# Altium PCB PCB1.PcbDoc
Units mil, origin at the board's own origin, x right, y up, seen from the top; angles counter-clockwise.
Board outline 1130 x 1130 mil, 2 copper layers (Top Layer, Bottom Layer); 27 components, 43 nets, 137 pads, 26 vias.
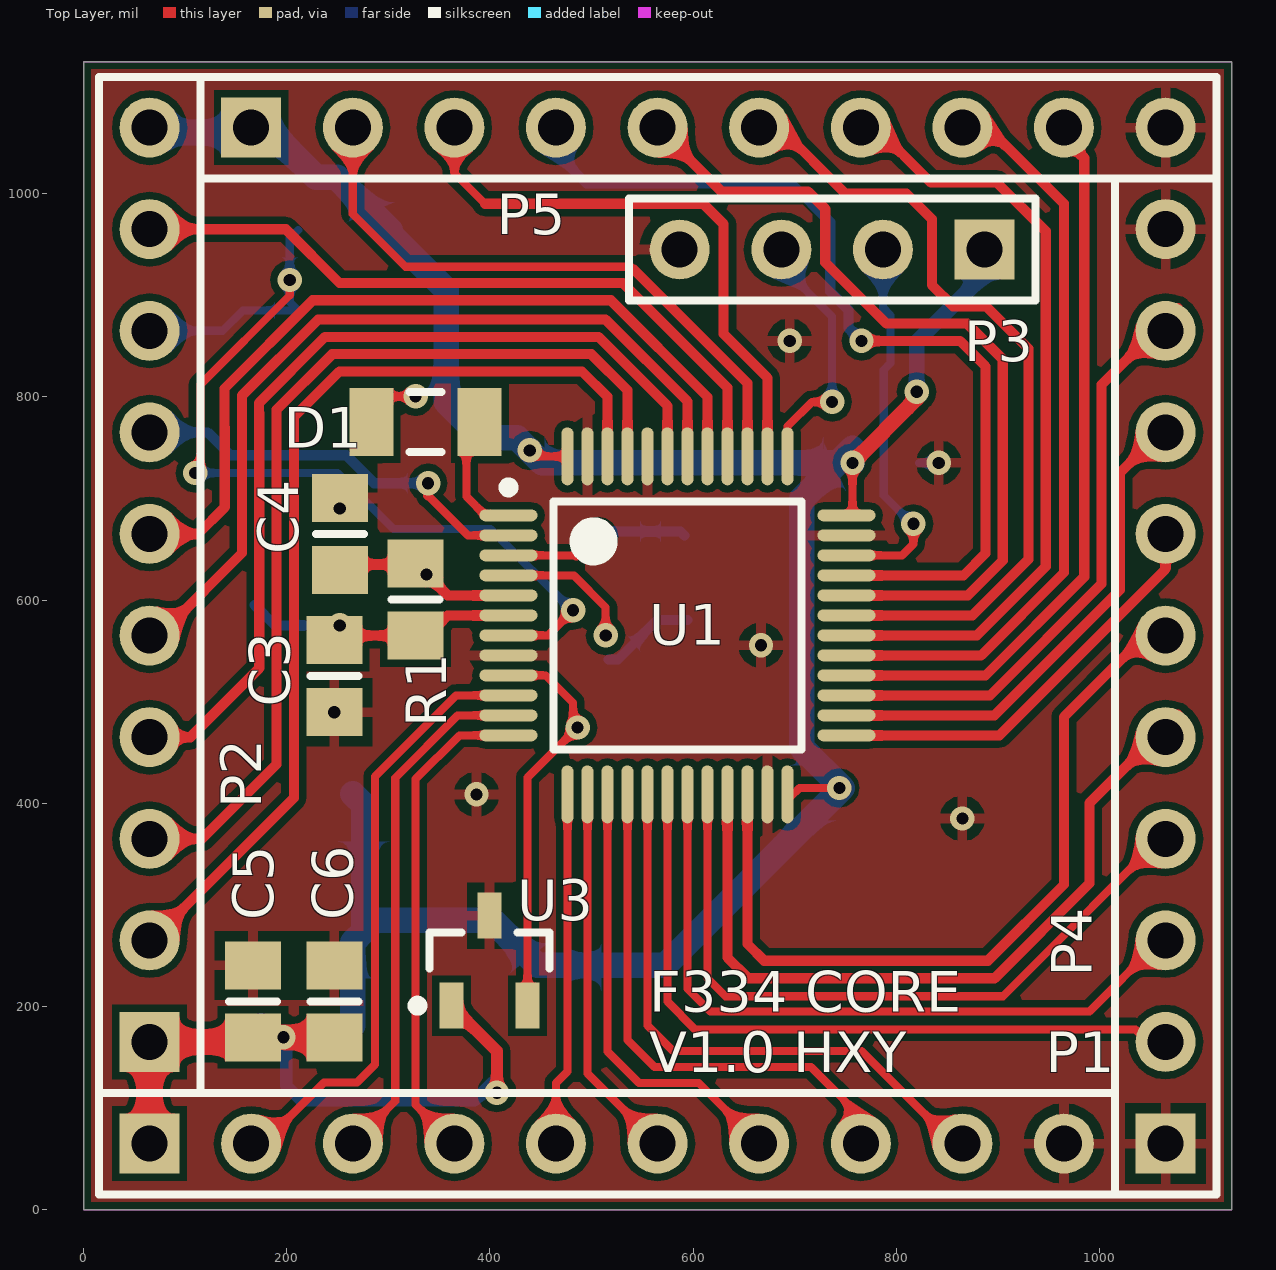
[diagram p0: Top Layer view]
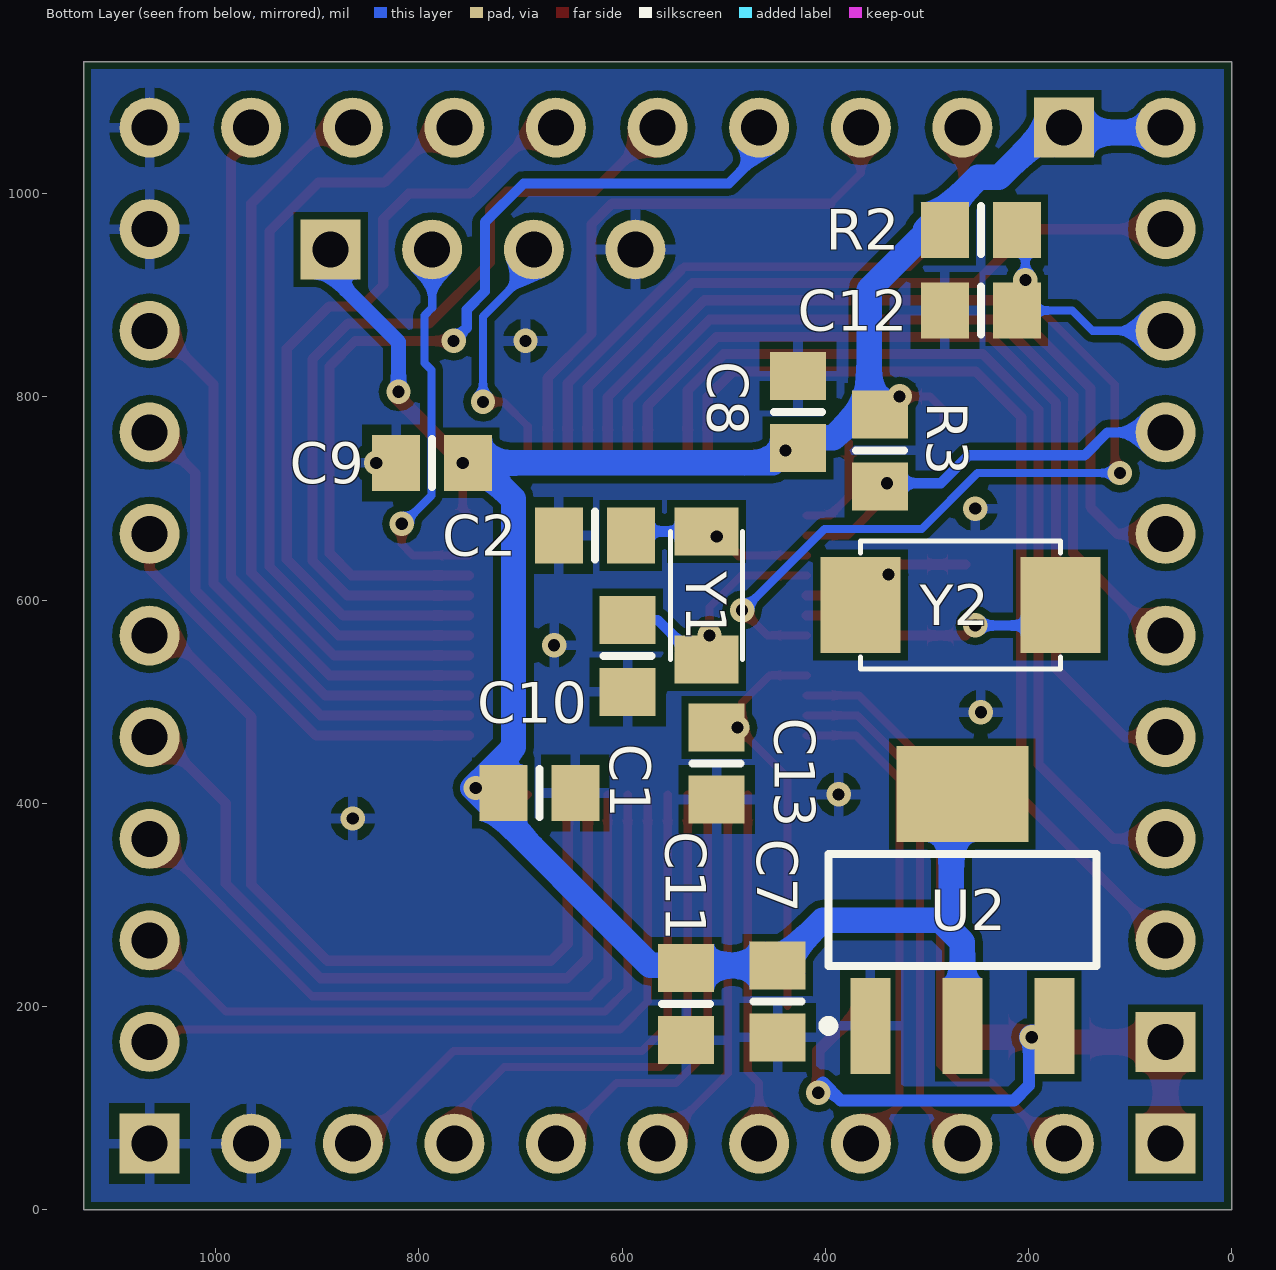
[diagram p1: Bottom Layer view, seen from below]

## Layer stack, top to bottom
Top Solder: solder mask 0.4, Solder Resist, Dk 3.5
Top Layer: signal copper 1.4
Dielectric 1: dielectric 12.6, FR-4, Dk 4.8
Bottom Layer: signal copper 1.4
Bottom Solder: solder mask 0.4, Solder Resist, Dk 3.5

## Board outline
0,0 1130,0 1130,1130 0,1130

## Design rules (kind name [scope] priority, off if disabled: settings)
Clearance [All] p1: gap=7 ignorepadtopadclearanceinfootprint=FALSE
ComponentClearance [All] p1: gap=0 collisioncheckmode=3 verticalgap=10 showdistances=TRUE
PlaneConnect [InNet('GND')] p1: planeconnectstyle=Direct reliefexpansion=20 reliefentries=4 reliefconductorwidth=10 reliefairgap=10
PolygonConnect [All] p1: connectstyle=Relief reliefconductorwidth=10 reliefentries=4 polygonreliefangle="90 Angle" airgapwidth=10
RoutingVias [All] p1: holewidth=28 width=24 viastyle="Through Hole" minholewidth=12 minwidth=24 maxholewidth=12 maxwidth=50
SolderMaskExpansion [All] p1: expansion=4
Width [InNet('5V')] p1: maxlimit=25 minlimit=12 preferedwidth=12
28 further rules are at their usual default settings.

## Components (designator, comment, footprint, x,y, rotation, side; value= is the part's Value field where it differs from the comment)
C1 "Cap" 6-0805_N 594.41,545 r270 bottom value=18pF
C2 "Cap" 6-0805_N 626.81,663.58 r0 bottom value=18pF
C3 "Cap" 6-0805_N 246.81,525 r270 top value=18pF
C4 "Cap" 6-0805_N 252.24,665 r90 top value=18pF
C5 "Cap" 6-0805_N 166.81,205 r270 top value=10uF
C6 "Cap" 6-0805_N 246.81,205 r270 top value=100nF
C7 "Cap" 6-0805_N 446.81,205 r90 bottom locked value=10uF
C8 "Cap" 6-0805_N 426.81,785 r270 bottom locked value=100nF
C9 "Cap" 6-0805_N 786.81,735 r180 bottom value=100nF
C10 "Cap" 6-0805_N 681.42,410 r0 bottom value=100nF
C11 "100nF" 6-0805_N 536.81,202.24 r90 bottom locked
C12 "Cap" 6-0805_N 246.81,885 r180 bottom value=10uF
C13 "100nF" 6-0805_N 506.81,439.06 r90 bottom locked
D1 "1N4148" C1206 336.81,775 r0 top
P1 "Header 10" HDR1X10 65,65 r0 top locked
P2 "Header 10" HDR1X10 65,165 r90 top locked
P3 "调试口" HDR1X4 886.81,945 r180 top locked
P4 "Header 10" HDR1X10 1065,65 r90 top locked
P5 "Header 10" HDR1X10 165,1065 r0 top locked
R1 "Res3" 6-0805_N 326.81,600.43 r90 top locked value=1M
R2 "Res3" 6-0805_N 246.81,964.09 r180 bottom value=10K
R3 "Res1" 6-0805_N 345.98,747.28 r90 bottom locked value=10K
U1 "STM32F103C8T6" LQFP48-7x7 584.57,575 r0 top locked
U2 "LM1117" SOT223_N 265,295 r90 bottom locked
U3 "REF3033" SOT-23_N 399.57,245 r90 top locked
Y1 "32.768K" XTAL-3215 516.81,604.53 r90 bottom locked
Y2 "8M" XTAL-5032 266.81,595 r0 bottom locked

## Footprints (in the part's own frame and the unit in brackets; to place one, negate y for a bottom-side part, rotate by r counter-clockwise, add the part's x,y. Pads: shape width x height; smd on the part's side, far side on the other; paste and mask are expansions set on the pad)
6-0805_N [mm] "Chip Resistor, Body 2.0x1.2mm, IPC Medium Density"
  rect 1.2x1.4 smd: 1(-0.9,0) 2(0.9,0)
  silkscreen extent 0,-0.6 0,0.6, body extent -1.07,-0.7 1.07,0.7, height 0.7
C1206 [mm] "Chip Capacitor, Body 3.2x1.6mm, IPC High Density"
  rect 1.1x1.7 smd: 1(-1.35,0) 2(1.35,0)
  silkscreen extent -0.4,-0.75 0.4,0.75, body extent -1.7,-0.9 1.7,0.9, height 1.3
HDR1X4 [mm] "Connector; Header; 4 Position"
  rect 1.5x1.5 hole 0.9: 1(0,0)
  round 1.5 hole 0.9: 2(2.54,0) 3(5.08,0) 4(7.62,0)
  silkscreen extent -1.27,-1.27 8.89,1.27
HDR1X10 [mm] "Connector; Header; 10 Position"
  rect 1.5x1.5 hole 0.9: 1(0,0)
  round 1.5 hole 0.9: 2(2.54,0) 3(5.08,0) 4(7.62,0) 5(10.16,0) 6(12.7,0) 7(15.24,0) 8(17.78,0) 9(20.32,0) 10(22.86,0)
  silkscreen extent -1.27,-1.27 24.13,1.27
LQFP48-7x7 [mm]
  oval 1.45x0.3 smd: 1(-4.225,2.75) 2(-4.225,2.25) 3(-4.225,1.75) 4(-4.225,1.25) 5(-4.225,0.75) 6(-4.225,0.25) 7(-4.225,-0.25) 8(-4.225,-0.75) 9(-4.225,-1.25) 10(-4.225,-1.75) 11(-4.225,-2.25) 12(-4.225,-2.75) 25(4.225,-2.75) 26(4.225,-2.25) 27(4.225,-1.75) 28(4.225,-1.25) 29(4.225,-0.75) 30(4.225,-0.25) 31(4.225,0.25) 32(4.225,0.75) 33(4.225,1.25) 34(4.225,1.75) 35(4.225,2.25) 36(4.225,2.75)
  oval 0.3x1.45 smd: 13(-2.75,-4.225) 14(-2.25,-4.225) 15(-1.75,-4.225) 16(-1.25,-4.225) 17(-0.75,-4.225) 18(-0.25,-4.225) 19(0.25,-4.225) 20(0.75,-4.225) 21(1.25,-4.225) 22(1.75,-4.225) 23(2.25,-4.225) 24(2.75,-4.225) 37(2.75,4.225) 38(2.25,4.225) 39(1.75,4.225) 40(1.25,4.225) 41(0.75,4.225) 42(0.25,4.225) 43(-0.25,4.225) 44(-0.75,4.225) 45(-1.25,4.225) 46(-1.75,4.225) 47(-2.25,4.225) 48(-2.75,4.225)
  silkscreen extent -4.35,-3.1 3.1,3.57, body extent -3.5,-3.5 3.5,3.5, height 1.6
SOT223_N [mm] "SOT223, 4-Leads, Body 6.5x3.5mm, Pitch 2.3mm, Lead Span 7mm, IPC Medium Density"
  rect 2.4x1 smd: 1(-2.9,2.3) 2(-2.9,0) 3(-2.9,-2.3)
  rect 2.4x3.3 smd: 4(2.9,0)
  silkscreen extent -3.02,-3.35 1.4,3.48, body extent -1.85,-3.35 1.85,3.35, height 1.7
SOT-23_N [mm] "SOT23, 3-Leads, Body 2.9x1.3mm, Pitch 0.95mm, Lead Span 2.5mm, IPC Medium Density"
  rect 1.15x0.6 smd: 1(-1.125,0.95) 2(-1.125,-0.95) 3(1.125,0)
  silkscreen extent -1.25,-1.5 0.7,1.92, body extent -0.7,-1.5 0.7,1.5, height 1.1
XTAL-3215 [mm]
  rect 1.2x1.6 smd: 1(-1.6,0) 2(1.6,0)
  silkscreen extent -1.6,-0.9 1.6,0.9
XTAL-5032 [mm]
  rect 2x2.4 smd: 1(-2.5,0) 2(2.5,0)
  silkscreen extent -2.5,-1.6 2.5,1.6

## Part data
C1 C2 C3 C4 C5 C6 C7 C8 C9 C10 C12: "Capacitor", LatestRevisionDate=17-Jul-2002, LatestRevisionNote="Re-released for DXP Platform.", PackageDescription="Radial Cap, Thru-Hole; 2 Leads; 0.3 in Pin Spacing", PackageReference=RAD-0.3, Published=8-Jun-2000, Publisher="Altium Limited"
C11 C13: library part Cap, "Capacitor", LatestRevisionDate=17-Jul-2002, LatestRevisionNote="Re-released for DXP Platform.", PackageDescription="Radial Cap, Thru-Hole; 2 Leads; 0.3 in Pin Spacing", PackageReference=RAD-0.3, Published=8-Jun-2000, Publisher="Altium Limited"
D1: library part "Diode 1N4148", "High Conductance Fast Diode", Code_JEDEC=DO-204-AH, ComponentLink1Description="Manufacturer Link", ComponentLink1URL=http://www.fairchildsemi.com/, ComponentLink2Description=Datasheet, ComponentLink2URL=http://www.fairchildsemi.com/ds/1N%2F1N4148.pdf, DatasheetVersion=1997, LatestRevisionDate=17-Jul-2002, LatestRevisionNote="Re-released for DXP Platform.", PackageDescription="Diode, Axial; Body 3.8 x 1.9 mm (LxDia. max), Lead Dia. 0.53 mm (max)", PackageReference=DO-35, Published=8-Jun-2000, Publisher="Altium Limited"
P1 P2 P4 P5: "Header, 10-Pin", LatestRevisionDate=17-Jul-2002, LatestRevisionNote="Re-released for DXP Platform.", Publisher="Altium Limited"
P3: library part "Header 4", "Header, 4-Pin", LatestRevisionDate=17-Jul-2002, LatestRevisionNote="Re-released for DXP Platform.", Publisher="Altium Limited"
R1 R2 R3: "Resistor", Published=8-Jun-2000, Publisher="Altium Limited"
  R1 R2: LatestRevisionDate=29-May-2009, LatestRevisionNote="IPC-7351 Footprint Added.", PackageDescription="Chip Resistor", PackageReference=J1-0603
  R3: LatestRevisionDate=17-Jul-2002, LatestRevisionNote="Re-released for DXP Platform.", PackageDescription="Axial Device, Thru-Hole; 2 Leads; 0.3 in Pin Spacing", PackageReference=AXIAL-0.3
U1: library part STM32F103CxT6
U3: library part REF30xx
Y1 Y2: library part XTAL, "Crystal Oscillator", LatestRevisionDate=17-Jul-2002, LatestRevisionNote="Re-released for DXP Platform.", PackageDescription="Crystal, Thru-Hole; 2 Leads; Body 3.1 x 8.2 mm (Dia.xH)", PackageReference=R38, Published=8-Jun-2000, Publisher="Altium Limited"

## Via types
v1: diameter 24, hole 12, Top Layer to Bottom Layer, 26 vias

## Nets (pads, with @x,y where several pads share a name; then routed paths per layer and width w, separated by ;. In a path a pad name is that pad's centre, name@x,y a point inside that pad or via, vN(x,y) a via of type N, cw(c..) or ccw(c..) an arc to the next point about the centre after c; other vN are vias at no path point)
3V3: C7.2 C8.2 C9.2 C10.2 C11.2 D1.1 P2.10 P3.1 P5.1 R2.1 R3.2 U1.24 U1.36 U1.48 U2.2 U2.4 | length 2552.4
  Top Layer w8: D1.1 283.66,787.28 296.81,800.43 v1(326.81,800.43) ; v1(439.09,747.28) 445.04,741.34 U1.48 ; U1.24 695.63,405.87 704.76,415 v1(743.98,415) ; U1.36 756.81,689.17 v1(756.81,735)
  Top Layer w15: v1(756.81,735) 820,798.19 v1(820,805)
  Bottom Layer w8: R2.1 R2.1@301.76,964.09 ; P3.1@886.81,920.72 P3.1
  Bottom Layer w15: v1(820,805) 820,853.91 P3.1@886.81,920.72
  Bottom Layer w25: P2.10@65,1060 185,1060 229.03,1015.97 249.88,1015.97 R2.1@301.76,964.09 ; U2.2 265,263.19 275.91,274.09 ; U2.4 275.91,398.27 275.91,274.09 ; 306.59,955.69 356.81,905.47 356.81,795 392.24,759.57 426.81,759.57 v1(439.09,747.28) 451.38,735 C9.2@742.24,735 ; v1(756.81,735) 756.81,749.57 C9.2@742.24,735 ; 275.91,274.09 286.81,285 402.24,285 C7.2 572.24,240.43 746.81,415 706.81,455 706.81,699.57 C9.2@742.24,735
5V: C5.2 C6.2 P1.1 P2.1 U2.3 U3.1 | length 691.3
  Top Layer w12: U3.1 406.81,156.06 v1(406.81,115)
  Top Layer w25: P1.1 P2.1 162.24,165 C5.2 v1(196.81,169.57) C6.2
  Bottom Layer w12: v1(196.81,169.57) 199.57,166.81 199.57,122.24 214.28,107.53 384.77,107.53 402.24,125 406.81,120.43 v1(406.81,115)
  Bottom Layer w25: U2.3 185.71,169.57 v1(196.81,169.57)
AVRef+: C13.2 U1.9 U3.2 | length 388.5
  Top Layer w8: U1.9 454.88,525.79 481.81,498.86 v1@481.81,480 ; U3.2 436.97,425.16 v1(486.3,474.49)
  Bottom Layer w8: v1(486.3,474.49) C13.2@486.81,475
GND: C1.2 C2.2 C3.2 C4.2 C5.1 C6.1 C7.1 C8.1 C9.1 C10.1 C11.1 C12.1 C13.1 P1.10 P3.4 P4.1 P4.10 P5.10 U1.8 U1.23 U1.35 U1.44 U1.47 U2.1 U3.3 | length 19.6
  Bottom Layer w8: C9.1 v1(841.81,735)
  other v1: 865,385 386.81,408.66 246.81,489.57 666.81,555.46 252.24,690 695,855
NetD1_2: D1.2 U1.1 | length 102.3
  Top Layer w8: D1.2@376.81,755 376.81,701.85 395.39,683.27 U1.1
PA0: P1.2 U1.10 | length 601.9
  Top Layer w8: P1.2 176.81,65 236.81,125 268.98,125 286.81,142.83 286.81,426.21 366.7,506.1 U1.10
PA1: P1.3 U1.11 | length 514.2
  Top Layer w8: P1.3 306.81,106.81 306.81,425 368.23,486.42 U1.11
PA2: P1.4 U1.12 | length 483.7
  Top Layer w8: P1.4 326.81,103.19 326.81,423.66 369.88,466.73 U1.12
PA3: P1.5 U1.13 | length 348.3
  Top Layer w8: P1.5 465,124.49 476.3,135.79 U1.13
PA4: P1.6 U1.14 | length 372.2
  Top Layer w8: U1.14 495.98,134.02 P1.6
PA5: P1.7 U1.15 | length 439.9
  Top Layer w8: U1.15 515.67,155.63 546.81,124.49 605.51,124.49 P1.7
PA6: P1.8 U1.16 | length 529
  Top Layer w8: U1.16 535.35,167.09 562,140.44 715.93,140.44 765,91.38 P1.8
PA7: P1.9 U1.17 | length 585.5
  Top Layer w8: U1.17 555.04,181.34 580.31,156.06 765.75,156.06 856.81,65 P1.9
PA8: P5.8 U1.29 | length 741.9
  Top Layer w10: U1.29 883.45,545.47 965,627.02 965,990 890,1065 P5.8
PA9: P5.7 U1.30 | length 778.4
  Top Layer w10: U1.30 879.09,565.16 947,633.06 947,963 899.15,1010.85 834.15,1010.85 780,1065 P5.7
PA10: P5.6 U1.31 | length 802.4
  Top Layer w10: P5.6 685,1065 750,1000 810,1000 835,975 835,910 856,889 888.28,889 930,847.28 930,640.11 874.74,584.84 U1.31
PA11: P5.5 U1.32 | length 831.3
  Top Layer w10: P5.5 628.19,1001.81 713.19,1001.81 730,985 730,932.28 790.28,872 869.81,872 904.81,837 904.81,638.95 870.38,604.53 U1.32
PA12: P5.4 U1.33 | length 915.1
  Top Layer w10: U1.33 866.02,624.21 887.81,646 887.81,829.96 862.77,855 v1(765.75,855)
  Bottom Layer w10: P5.4 465,1040 495,1010 696.81,1010 735,971.81 735,903.64 752.81,885.83 752.81,867.94 v1(765.75,855)
PA15: P5.3 U1.38 | length 577.2
  Top Layer w8: P5.3 365,1020 395,990
  Top Layer w10: 395,990 610,990 630,970 630,861.81 673.15,818.66 U1.38
PB0: P4.2 U1.18 | length 720.7
  Top Layer w8: U1.18 574.72,204.68 601.96,177.45 1035.44,177.45 1047.89,165 P4.2 P4.2@1075,165
PB1: P4.3 U1.19 | length 726.8
  Top Layer w8: U1.19 594.41,217.4 616.81,195 990,195 1056.27,261.27 1068.73,261.27 P4.3@1086.01,278.56
PB2: P4.4 U1.20 | length 726.4
  Top Layer w8: U1.20 614.09,227.72 631.81,210 905,210 P4.4@1079.78,384.78
PB3: P5.2 U1.39 | length 614.5
  Top Layer w8: P5.2 265,980 317,928 538.81,928 541.81,925
  Top Layer w10: 541.81,925 653.46,813.35 U1.39
PB4: P2.9 U1.40 | length 701.1
  Top Layer w10: P2.9 198.98,965 251.98,912 530.77,912 633.78,808.99 U1.40
PB5: P2.6 U1.41 | length 810.9
  Top Layer w10: P2.6 112.59,665 139,691.41 139,769.94 138.81,770.13 138.81,808.17 225.64,895 518.94,895 614.09,799.84 U1.41
PB6: P2.5 U1.42 | length 833.3
  Top Layer w10: P2.5@65,573.19 82.97,573.19 156,646.22 156,776.98 155.81,777.17 155.81,801.12 230.69,876 513.89,876 594.41,795.48 U1.42
PB7: P2.4 U1.43 | length 908.2
  Top Layer w10: P2.4@65,475 75,465 105,465 173,533 173,784.02 172.81,784.21 172.81,794.08 237.73,859 506.85,859 574.72,791.13 U1.43
PB8: P2.3 U1.45 | length 952.1
  Top Layer w10: P2.3 116.65,365 190,438.35 190,787.23 244.77,842 499.81,842 535.35,806.46 U1.45
PB9: P2.2 U1.46 | length 969.2
  Top Layer w10: P2.2@65,270 71.81,270 207,405.19 207,780.19 251.81,825 490.67,825 515.67,800 U1.46
PB10: P4.5 U1.21 | length 766.4
  Top Layer w10: U1.21 633.78,248.03 654.09,227.72 896.76,227.72 990,320.96 990,400 P4.5@1077.28,487.28
PB11: P4.6 U1.22 | length 794.8
  Top Layer w10: U1.22 653.46,261.38 669.84,245 890,245 965,320 965,485 1045,565 P4.6
PB12: P4.7 U1.25 | length 416.5
  Top Layer w10: U1.25 901.3,466.73 1065,630.43 P4.7
PB13: P4.8 U1.26 | length 519.9
  Top Layer w10: U1.26 896.52,486.42 1020,609.9 1020,725 P4.8@1079.78,784.78
PB14: P4.9 U1.27 | length 599.1
  Top Layer w10: U1.27 892.16,506.1 1002,615.94 1002,812 P4.9@1077.28,887.28
PB15: P5.9 U1.28 | length 721.7
  Top Layer w10: U1.28 887.81,525.79 985,622.98 985,1035 P5.9@960,1060
RST: C12.2 P2.8 R2.2 U1.7 | length 970.8
  Top Layer w8: v1(110,725) 115,730 115,812.04 202.95,900 v1(202.95,915) ; U1.7 456.97,565.16 v1(481.81,590)
  Bottom Layer w8: P2.8 136.81,865 156.81,885 C12.2 202.95,893.43 v1(202.95,915) 202.95,955.67 R2.2 ; v1(110,725) 250,725 305,670 400.61,670 480.61,590 v1(481.81,590)
STM32_X32I: C2.1 U1.3 Y1.2 | length 172.4
  Top Layer w8: U1.3 484.88,643.9
  Top Layer w10: 484.88,643.9 503.4,662.41 v1(506.81,662.41)
  Bottom Layer w10: Y1.2 587.44,667.52 C2.1
STM32_X32O: C1.1 U1.4 Y1.1 | length 230.1
  Top Layer w8: U1.4 482.6,624.21 513.89,592.92 v1(513.89,565.16)
  Bottom Layer w10: Y1.1 526.1,541.54 565,580.43 C1.1
STM32_XI: C4.1 R1.2 U1.5 Y2.2 | length 169.3
  Top Layer w10: C4.1@262.24,635 325.94,635 R1.2 v1(337.68,625) 358.15,604.53 U1.5
STM32_XO: C3.1 R1.1 U1.6 Y2.1 | length 270.5
  Top Layer w10: v1(252.24,575) 262.24,565 R1.1 338.31,565 358.15,584.84 U1.6
  Bottom Layer w10: Y2.1 188.39,575 v1(252.24,575)
SWDCK: P3.3 U1.37 | length 281.5
  Top Layer w8: U1.37 692.83,771.02 716.81,795 v1(736.81,795)
  Top Layer w12: P3.3 P3.3@692.83,938.98
  Bottom Layer w8: P3.3@686.81,961.7 694.17,949.41 692.7,943.52 688.64,927.37 736.81,879.21 v1(736.81,795)
SWDIO: P3.2 U1.34 | length 379.3
  Top Layer w8: U1.34 805.71,643.9 816.81,655 v1(816.81,675)
  Bottom Layer w8: P3.2 786.81,887.72 794.37,880.17 794.37,833.32 787.62,826.57 787.62,702.88 815.51,675 v1(816.81,675)
WKUP: P2.7 R3.1 U1.2 | length 402.4
  Top Layer w8: 339.09,702.72 378.23,663.58 U1.2
  Top Layer w10: 339.09,702.72 v1(339.09,715)
  Bottom Layer w10: P2.7 122.16,765 144.69,742.47 258.72,742.47 286.19,715 v1(339.09,715)

## Polygon pours and split planes (outlines as drawn)
GND on Top Layer "GND_L01_P006" (solid, remove dead copper, pour order 6): 0,1130 0,0 1130,0 1130,1130
GND on Bottom Layer "GND_L02_P008" (solid, remove dead copper, pour order 8): 0,1130 0,0 1130,0 1130,1130

## Keep-outs
Keep-Out Layer:
  the board outline again, w1

## Silkscreen, mask and mechanical layers (free items; w line width, h text height)
Top Overlay:
  text "F334 CORE" at 556.81,195 h40
  text "V1.0 HXY" at 556.81,135 h40
Mechanical 1:
  rectangle: 0,0 1130,1130